# Altium PCB Lantern_REV_B3.PcbDoc (part 1 of 2)
Units mm, origin at the board's own origin, x right, y up, seen from the top; angles counter-clockwise.
Board outline 55 x 135 mm, 4 copper layers (SIG/PWR1, GND1, GND2, SIG/PWR2), stack 1.527 mm thick; 136 components, 65 nets, 452 pads, 147 vias.
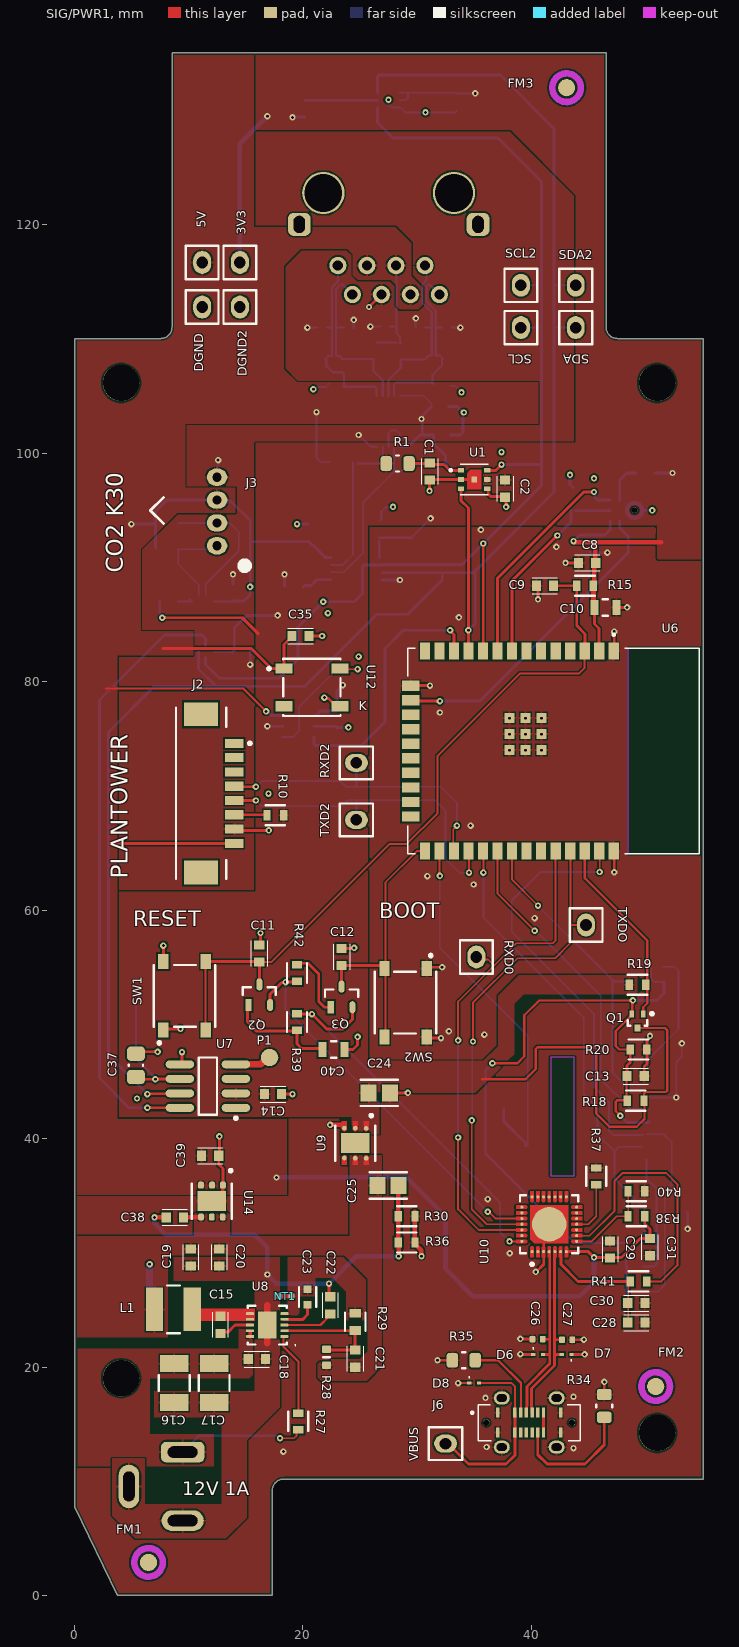
[diagram p0: SIG/PWR1 view]
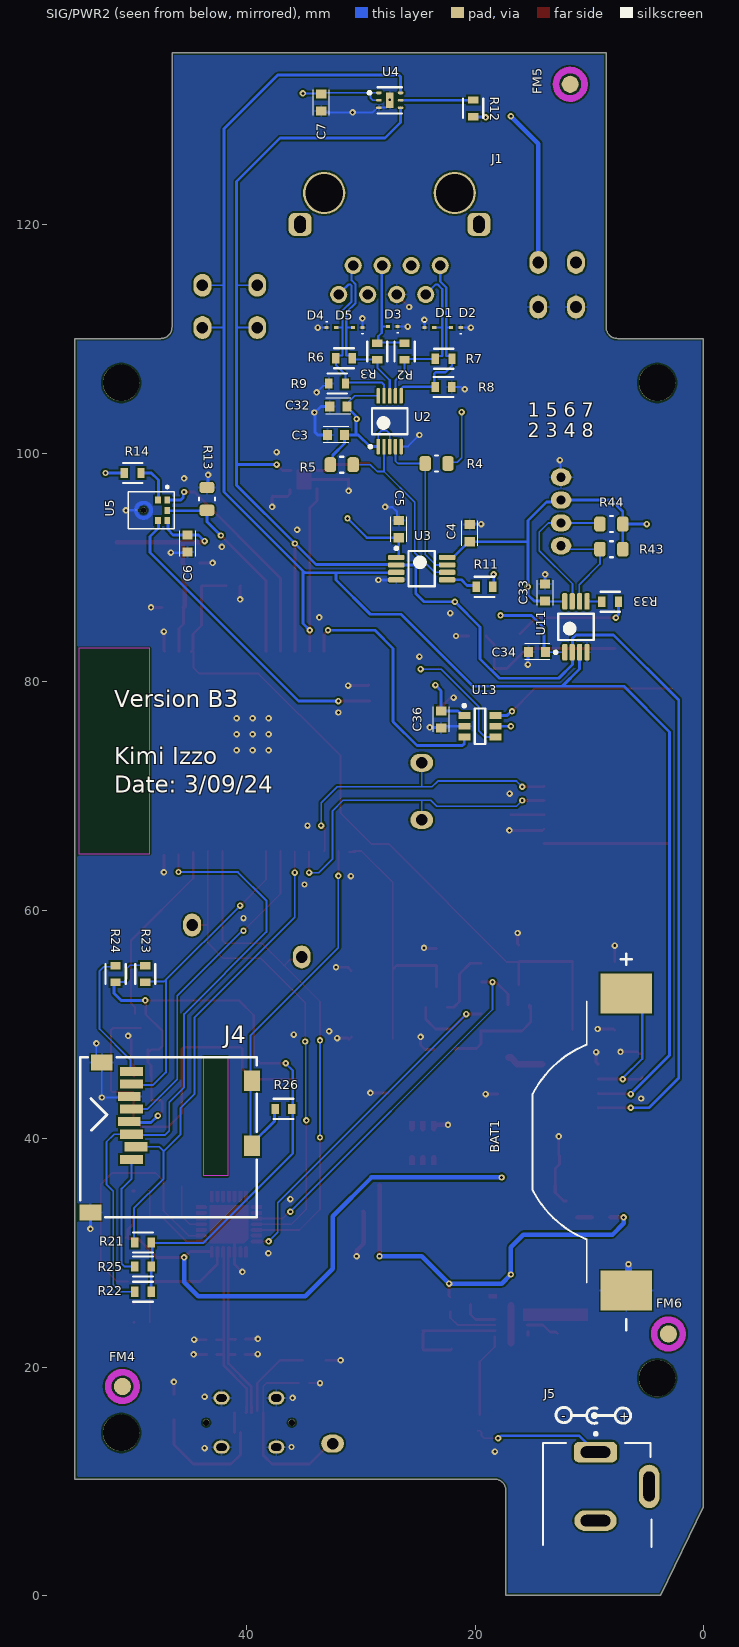
[diagram p1: SIG/PWR2 view, seen from below]
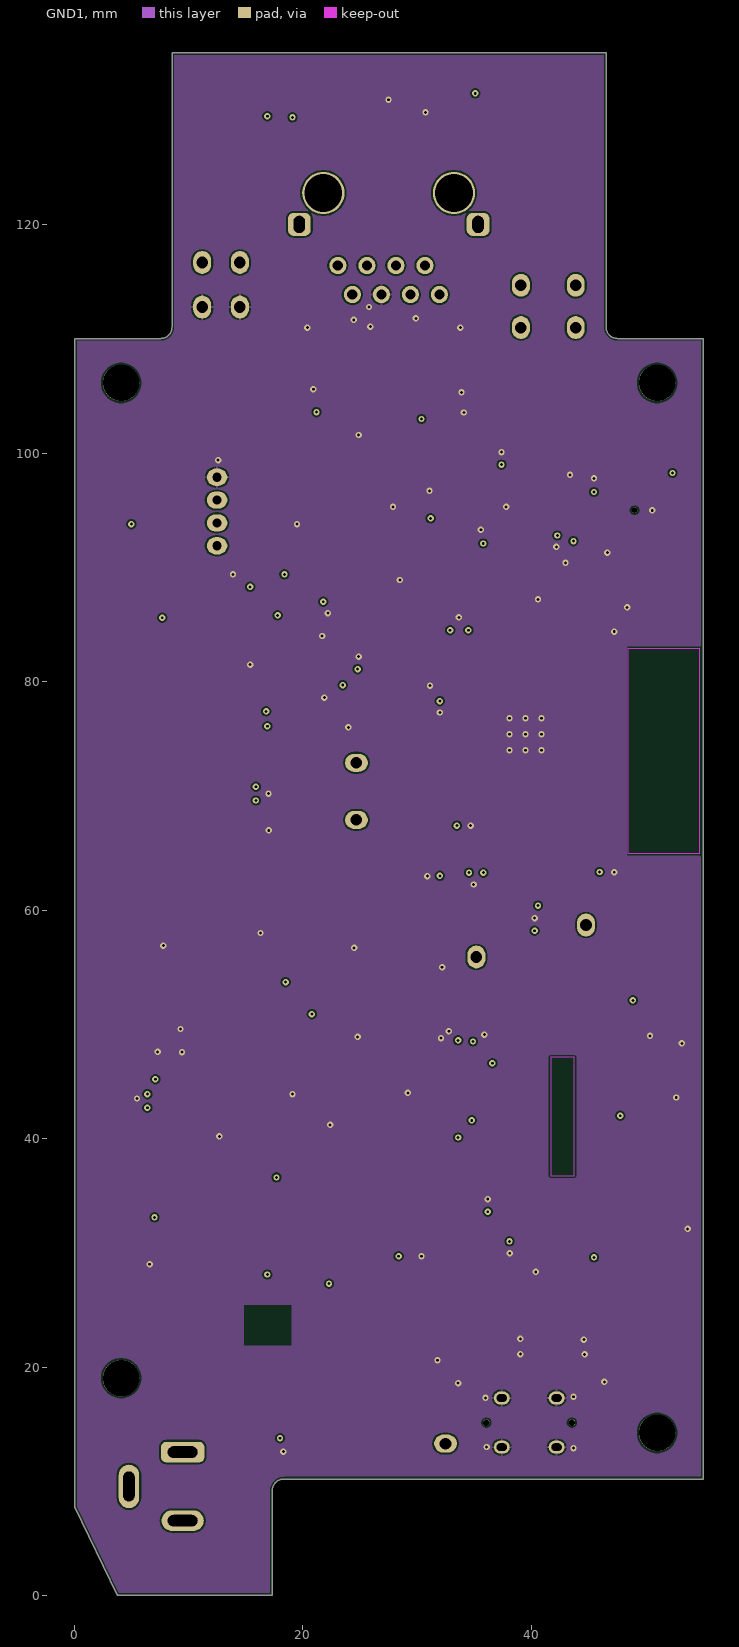
[diagram p2: GND1]
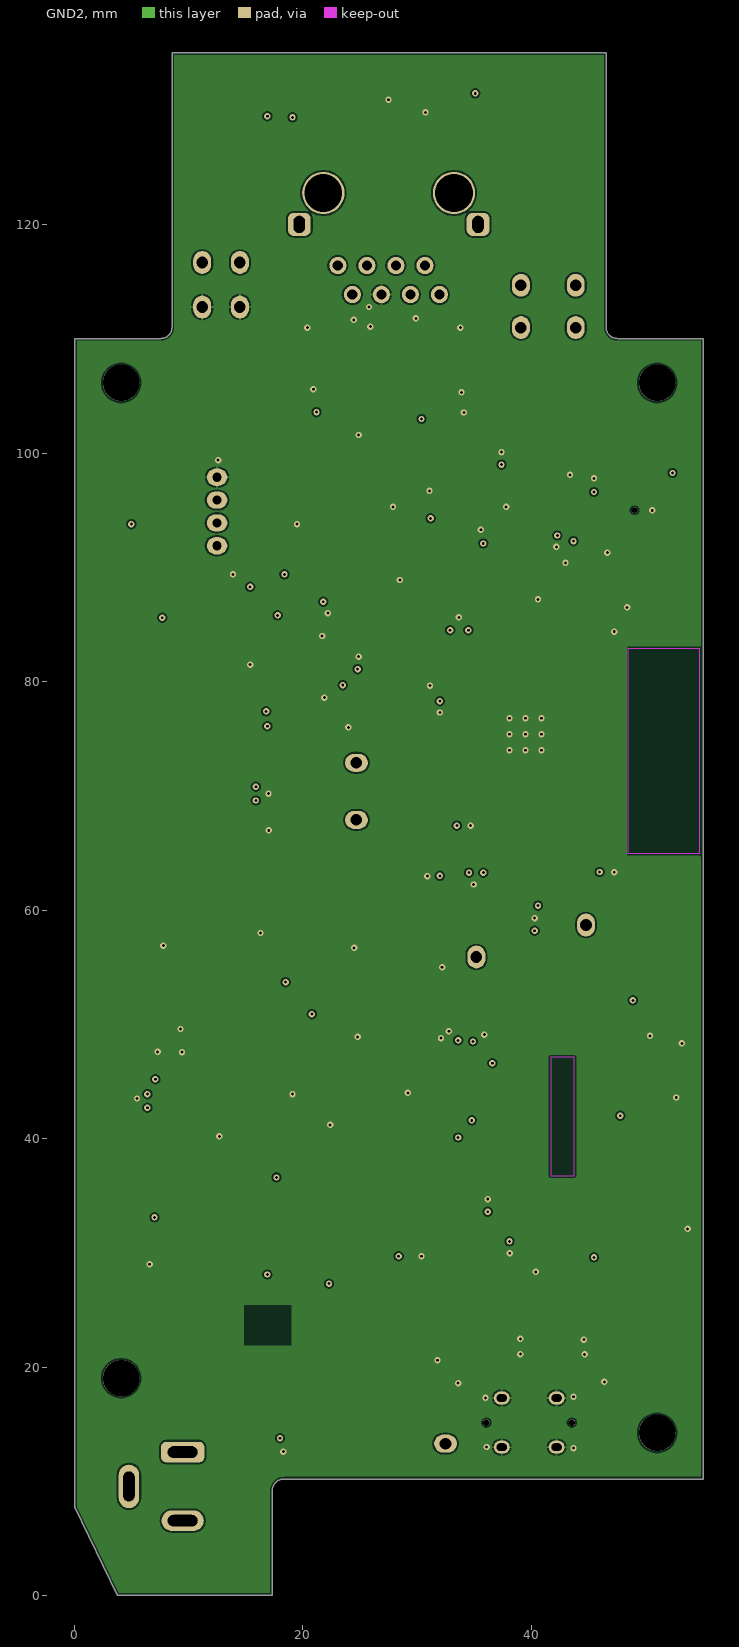
[diagram p3: GND2]
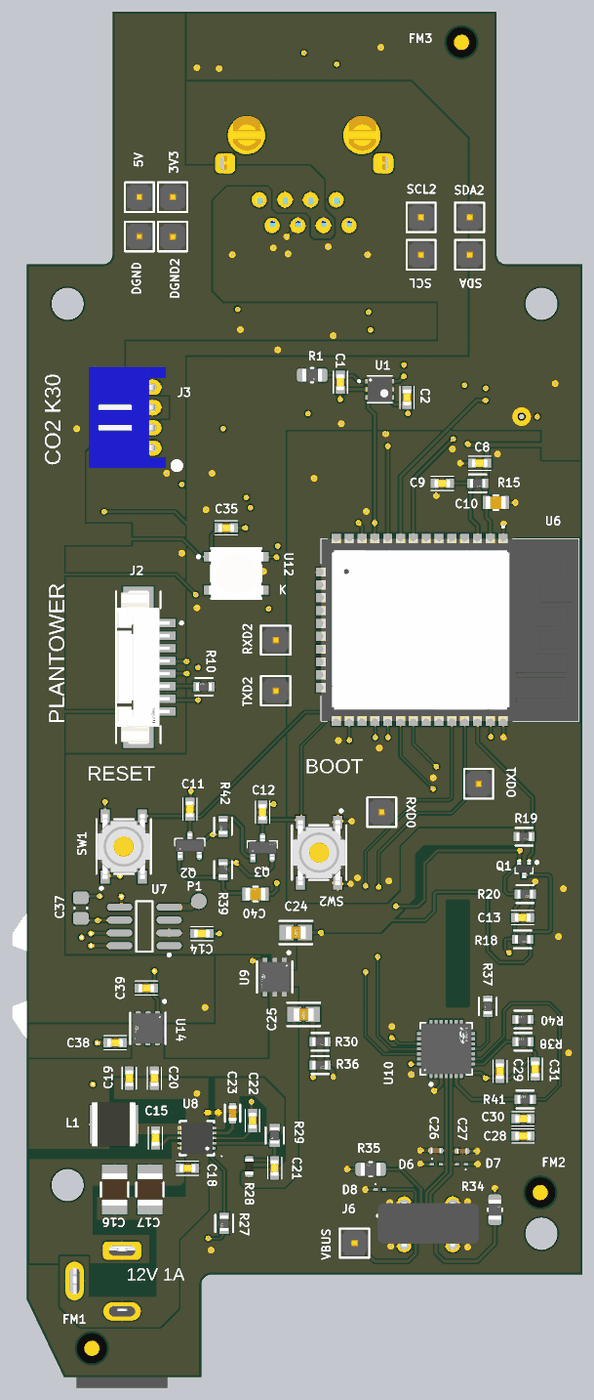
[diagram p5: 3D render of the assembled board from above, using the file's embedded part models]
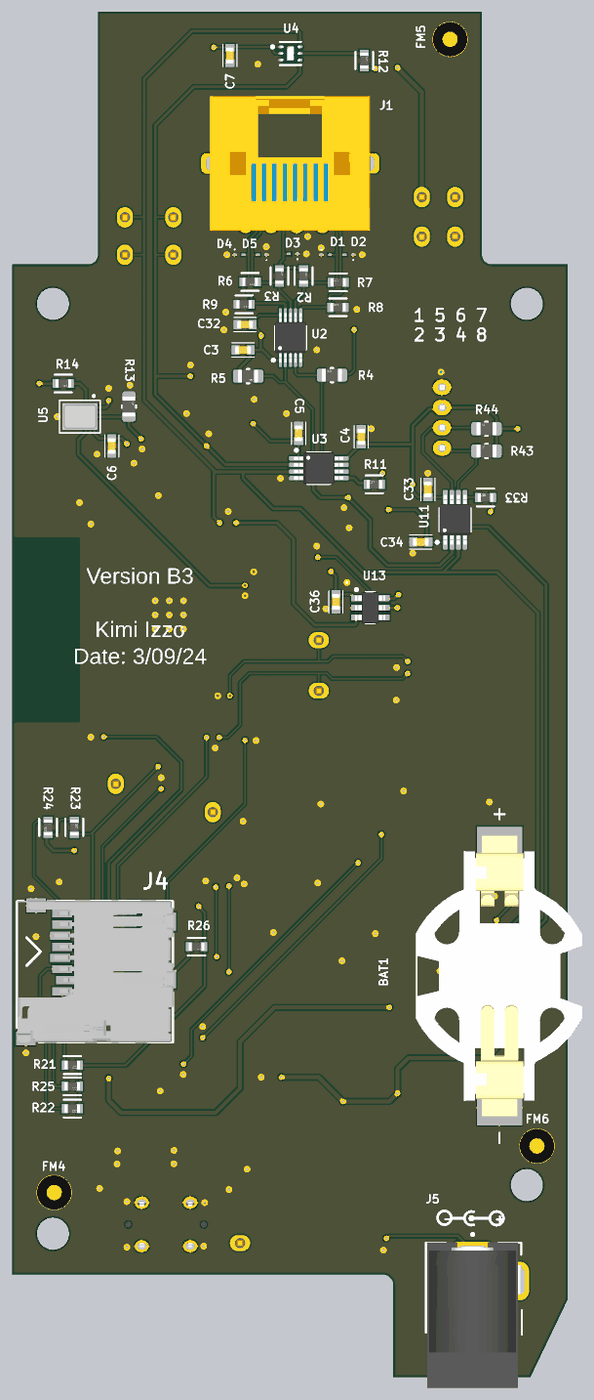
[diagram p6: 3D render of the assembled board from below, using the file's embedded part models]

## Layer stack, top to bottom
Top Solder: solder mask 0.0175, Solder Resist, Dk 3.5
SIG/PWR1: signal copper 0.0175
Dielectric 2: prepreg 0.196, PP-006, Dk 4.56
GND1: signal copper 0.035
Dielectric 1: dielectric 1.03, FR-4, Dk 4.6
GND2: signal copper 0.035
Dielectric 3: prepreg 0.196, PP-006, Dk 4.56
SIG/PWR2: signal copper 0.0175
Bottom Solder: solder mask 0.0175, Solder Resist, Dk 3.5

## Board outline
0.058,7.741 0.058,110.041 7.558,110.041 7.558,110.042 ccw(c7.558,111.042) 8.558,111.042 8.558,135.043 46.558,135.043 46.558,111.042 ccw(c47.558,111.042) 47.558,110.042 47.558,110.041 55.058,110.041 55.058,10.189 18.327,10.189 18.328,10.191 ccw(c18.328,9.191) 17.328,9.191 17.328,0.041 3.758,0.041

## Design rules (kind name [scope] priority, off if disabled: settings)
BoardOutlineClearance [All] p1: gap=0.2 ignorepadtopadclearanceinfootprint=FALSE
Clearance [All] p1: gap=0.154 ignorepadtopadclearanceinfootprint=TRUE
ComponentClearance [All] p1: gap=0.102 collisioncheckmode=3 verticalgap=0.102 showdistances=TRUE
DiffPairsRouting [InDifferentialPair('D')] p1: maxlimit=0.254 minlimit=0.125 mostfreqgap=0.254 toplayer_mingap=0.154 toplayer_maxgap=0.154 toplayer_prefgap=0.154 toplayer_minwidth=0.246 toplayer_maxwidth=0.246 toplayer_prefwidth=0.246 bottomlayer_mingap=0.154 bottomlayer_maxgap=0.154 bottomlayer_prefgap=0.154 bottomlayer_minwidth=0.246 bottomlayer_maxwidth=0.246 bottomlayer_prefwidth=0.246 impedanceprofiledriven=TRUE impedanceprofileid={B0678E9C-AD64-40C4-918B-FBF8B8CF60FA} impedanceprofilevalue=90.000000 maxuncoupledlength=12.7
DiffPairsRouting "di2c scl diff pair" [InDifferentialPair('SCL')] p2: maxlimit=0.154 minlimit=0.127 mostfreqgap=0.154 toplayer_mingap=0.154 toplayer_minwidth=0.188 toplayer_maxwidth=0.188 toplayer_prefwidth=0.188 bottomlayer_mingap=0.154 bottomlayer_minwidth=0.188 bottomlayer_maxwidth=0.188 bottomlayer_prefwidth=0.188 impedanceprofiledriven=TRUE impedanceprofileid={01536B08-8223-496A-8431-0511F6C60731} impedanceprofilevalue=100.000000 maxuncoupledlength=12.7
DiffPairsRouting "di2c sda diff pair" [InDifferentialPair('SDA')] p3: maxlimit=0.154 minlimit=0.127 mostfreqgap=0.154 toplayer_mingap=0.154 toplayer_minwidth=0.188 toplayer_maxwidth=0.188 toplayer_prefwidth=0.188 bottomlayer_mingap=0.154 bottomlayer_minwidth=0.188 bottomlayer_maxwidth=0.188 bottomlayer_prefwidth=0.188 impedanceprofiledriven=TRUE impedanceprofileid={01536B08-8223-496A-8431-0511F6C60731} impedanceprofilevalue=100.000000 maxuncoupledlength=12.7
Height [All] p1: minheight=0 maxheight=1816.048 prefheight=12.7
HoleSize [All] p1: absolutevalues=TRUE maxlimit=6.3 minlimit=0.255 maxpercent=80.000 minpercent=20.000
HoleToHoleClearance [All] p1: gap=0.254 allowstackedmicrovias=FALSE
MinimumAnnularRing [All] p1: minimumring=0.15
MinimumSolderMaskSliver [All] p1: minsoldermaskwidth=0.102
PlaneClearance [All] p1: clearance=0.102
PlaneConnect "Direct connect" [All] p1: pad.planeconnectstyle=Direct pad.reliefexpansion=0.508 pad.reliefentries=4 pad.reliefconductorwidth=0.254 pad.reliefairgap=0.254 via.planeconnectstyle=Relief via.reliefexpansion=0.508 via.reliefentries=4 via.reliefconductorwidth=0.254 via.reliefairgap=0.254
PolygonConnect "DGND CONNECT" [InNet('DGND')] p1: thpad.connectstyle=Relief thpad.reliefconductorwidth=0.2 thpad.reliefentries=4 thpad.polygonreliefangle="90 Angle" thpad.airgapwidth=0.155 smdpad.connectstyle=Relief smdpad.reliefconductorwidth=0.2 smdpad.reliefentries=4 smdpad.polygonreliefangle="90 Angle" smdpad.airgapwidth=0.102 via.connectstyle=Direct via.reliefconductorwidth=0.2 via.reliefentries=4 via.polygonreliefangle="90 Angle" via.airgapwidth=0.155
PolygonConnect "PGND CONNECT" [(InNet('PGND') AND NOT InComponent('U8')) vs InNet('PGND')] p2: thpad.connectstyle=Relief thpad.reliefconductorwidth=0.2 thpad.reliefentries=4 thpad.polygonreliefangle="90 Angle" thpad.airgapwidth=0.155 smdpad.connectstyle=Relief smdpad.reliefconductorwidth=0.2 smdpad.reliefentries=4 smdpad.polygonreliefangle="90 Angle" smdpad.airgapwidth=0.102 via.connectstyle=Direct via.reliefconductorwidth=0.2 via.reliefentries=4 via.polygonreliefangle="90 Angle" via.airgapwidth=0.155
PolygonConnect "5V CONNECT" [InNet('5V')] p3: thpad.connectstyle=Relief thpad.reliefconductorwidth=0.2 thpad.reliefentries=4 thpad.polygonreliefangle="90 Angle" thpad.airgapwidth=0.155 smdpad.connectstyle=Relief smdpad.reliefconductorwidth=0.2 smdpad.reliefentries=4 smdpad.polygonreliefangle="90 Angle" smdpad.airgapwidth=0.102 via.connectstyle=Direct via.reliefconductorwidth=0.2 via.reliefentries=4 via.polygonreliefangle="90 Angle" via.airgapwidth=0.155
PolygonConnect "3V3 SD CONNECT" [InNet('3.3V_SD')] p4: thpad.connectstyle=Relief thpad.reliefconductorwidth=0.2 thpad.reliefentries=4 thpad.polygonreliefangle="90 Angle" thpad.airgapwidth=0.155 smdpad.connectstyle=Relief smdpad.reliefconductorwidth=0.2 smdpad.reliefentries=4 smdpad.polygonreliefangle="90 Angle" smdpad.airgapwidth=0.102 via.connectstyle=Direct via.reliefconductorwidth=0.2 via.reliefentries=4 via.polygonreliefangle="90 Angle" via.airgapwidth=0.155
PolygonConnect "C16 CONNECT" [InNet('NetC16_2')] p5: thpad.connectstyle=Relief thpad.reliefconductorwidth=0.2 thpad.reliefentries=4 thpad.polygonreliefangle="90 Angle" thpad.airgapwidth=0.155 smdpad.connectstyle=Relief smdpad.reliefconductorwidth=0.2 smdpad.reliefentries=4 smdpad.polygonreliefangle="90 Angle" smdpad.airgapwidth=0.102 via.connectstyle=Direct via.reliefconductorwidth=0.2 via.reliefentries=4 via.polygonreliefangle="90 Angle" via.airgapwidth=0.155
PolygonConnect GNDCONNECT_1 [InNet('GND')] p6: thpad.connectstyle=Relief thpad.reliefconductorwidth=0.2 thpad.reliefentries=4 thpad.polygonreliefangle="90 Angle" thpad.airgapwidth=0.155 smdpad.connectstyle=Relief smdpad.reliefconductorwidth=0.2 smdpad.reliefentries=4 smdpad.polygonreliefangle="90 Angle" smdpad.airgapwidth=0.102 via.connectstyle=Direct via.reliefconductorwidth=0.2 via.reliefentries=4 via.polygonreliefangle="90 Angle" via.airgapwidth=0.155
PolygonConnect "3V3 CONNECT" [InNet('3.3V')] p7: thpad.connectstyle=Relief thpad.reliefconductorwidth=0.2 thpad.reliefentries=4 thpad.polygonreliefangle="90 Angle" thpad.airgapwidth=0.155 smdpad.connectstyle=Relief smdpad.reliefconductorwidth=0.2 smdpad.reliefentries=4 smdpad.polygonreliefangle="90 Angle" smdpad.airgapwidth=0.102 via.connectstyle=Direct via.reliefconductorwidth=0.2 via.reliefentries=4 via.polygonreliefangle="90 Angle" via.airgapwidth=0.155
PolygonConnect "5V BARREL" [InNet('5V_BRRL')] p8: thpad.connectstyle=Relief thpad.reliefconductorwidth=0.2 thpad.reliefentries=4 thpad.polygonreliefangle="90 Angle" thpad.airgapwidth=0.155 smdpad.connectstyle=Relief smdpad.reliefconductorwidth=0.2 smdpad.reliefentries=4 smdpad.polygonreliefangle="90 Angle" smdpad.airgapwidth=0.102 via.connectstyle=Direct via.reliefconductorwidth=0.2 via.reliefentries=4 via.polygonreliefangle="90 Angle" via.airgapwidth=0.155
PolygonConnect PolygonConnect_1 [All] p9: connectstyle=Direct reliefconductorwidth=0.254 reliefentries=4 polygonreliefangle="90 Angle" airgapwidth=0.254
RoutingVias [All] p1: holewidth=0.255 width=0.56 viastyle="Through Hole" minholewidth=0.255 minwidth=0.56 maxholewidth=6.3 maxwidth=6.55
SilkToSilkClearance [All] p1: silktosilkclearance=0.127
SilkToSolderMaskClearance [IsPad] p1: minsilkscreentomaskgap=0.127 clearancetoexposedcopper=TRUE
SolderMaskExpansion [All] p1: expansion=0.051 istentingtop=FALSE
UnRoutedNet [All] p1: checkbadconnections=TRUE
Width general [All] p1: maxlimit=0.6 minlimit=0.153 preferedwidth=0.25
Width [All] p2: maxlimit=0.254 minlimit=0.254 preferedwidth=0.254
Width Power_20mil [All] p3: maxlimit=25.4 minlimit=0.508 preferedwidth=0.508 minimp=50.000000 maximp=50.000000 favimp=50.000000
Width Width_10mil [All] p4: maxlimit=25.4 minlimit=0.254 preferedwidth=0.254 minimp=50.000000 maximp=50.000000 favimp=50.000000
Width Width_6mil [All] p5: maxlimit=25.4 minlimit=0.153 preferedwidth=0.2 minimp=50.000000 maximp=50.000000 favimp=50.000000
Width Width_4mil [All] p6: maxlimit=25.4 minlimit=0.102 preferedwidth=0.102 minimp=50.000000 maximp=50.000000 favimp=50.000000
19 further rules are at their usual default settings.

## Classes and differential pairs
component class Sensors_revB3: C1 C2 C3 C4 C5 C6 C7 C32 C33 C34 D1 D2 D3 D4 D5 J1 J2 J3 R1 R2 R3 R4 R5 R6 R7 R8 R9 R10 R11 R12 R13 R14 R33 R43 R44 U1 U2 U3 U4 U5 U11
component class Power_revB3: C15 C16 C17 C18 C19 C20 C21 C22 C23 C24 C25 C26 C27 C28 C29 C30 C31 C38 C39 C40 D6 D7 D8 J5 J6 L1 NT1 Q2 Q3 R27 R28 R29 R30 R34 R35 R36 R37 R38 R39 R40 R41 R42 U8 U9 U10 U14
component class Main_revB3: 3V3 5V *2 *3 *5 *? BAT1 C8 C9 C10 C11 C12 C13 C14 C35 C36 C37 DGND DGND2 FM1 FM2 FM3 FM4 FM5 FM6 J4 P1 Q1 R15 R18 R19 R20 R21 R22 R23 R24 R25 R26 RXD0 RXD2 SCL SCL2 SDA SDA2 SW1 SW2 TXD2 TXDO U6 U7 U12 U13 VBUS
differential pair SDA: +SDA_P -SDA_N
differential pair SCL: +SCL_P -SCL_N
differential pair D: +D_P -D_N

## Components (designator, comment, footprint, x,y, rotation, side; value= is the part's Value field where it differs from the comment)
3V3 "PH1-01-UA" FP-PH1-01-UA-MFG 14.5,116.7 r90 top
5V "PH1-01-UA" FP-PH1-01-UA-MFG 11.2,116.7 r90 top
BAT1 "BU1632SM-JJ-GTR" BU1632SM-JJ-GTR-Footprint-1 6.8,39.7 r270 bottom
C1 "CL10B105KA8NFNC" MANUF_CAP_0603 31.108,98.398 r90 top value=1µF
C2 "CL10B105KA8NFNC" MANUF_CAP_0603 37.708,96.898 r90 top value=1µF
C3 "CC0603KRX7R7BB104" MANUF_CAP_0603 32.2,101.6 r180 bottom value=100nF
C4 "CC0603KRX7R7BB104" MANUF_CAP_0603 20.5,93 r270 bottom value=100nF
C5 "CC0603KRX7R7BB104" MANUF_CAP_0603 26.7,93.35 r270 bottom value=100nF
C6 "CC0603KRX7R7BB104" MANUF_CAP_0603 45.2,92.1 r90 bottom value=100nF
C7 "CC0603KRX7R7BB104" MANUF_CAP_0603 33.5,130.7 r90 bottom value=100nF
C8 "CC0603KRX7R7BB104" MANUF_CAP_0603 44.9,90.4 r0 top value=100nF
C9 "CL10B105KA8NFNC" MANUF_CAP_0603 41.2,88.4 r0 top value=1µF
C10 "GRM21BZ71A226ME15L" FP-GRM21B-0_2-e0_2_0_7-MFG 46.5,86.5 r180 top value=22µF
C11 "CC0603KRX7R7BB104" MANUF_CAP_0603 16.2,56.2 r90 top value=100nF
C12 "CC0603KRX7R7BB104" MANUF_CAP_0603 23.4,55.9 r90 top value=100nF
C13 "CL10B105KA8NFNC" MANUF_CAP_0603 49.15,45.48 r180 top value=1µF
C14 "CL10B105KA8NFNC" MANUF_CAP_0603 17.4,43.9 r180 top value=1µF
C15 "CC0603KRX7R7BB104" MANUF_CAP_0603 12.8,23.7 r270 top value=100nF
C16 "C1210C106M3RACTU" FP-1210-L_3_2_0_3-W_2_5_0-MFG 8.748,18.6 r90 top value=10µF
C17 "C1210C106M3RACTU" FP-1210-L_3_2_0_3-W_2_5_0-MFG 12.248,18.6 r90 top value=10µF
C18 "CC0603KRX7R7BB104" MANUF_CAP_0603 15.975,20.7 r180 top value=100nF
C19 "C0603C220J5GACTU" MANUF_CAP_0603 10.2,29.6 r270 top value=22pF
C20 "C0603C220J5GACTU" MANUF_CAP_0603 12.7,29.6 r270 top value=22pF
C21 "C0603C220J5GACTU" MANUF_CAP_0603 24.592,20.734 r90 top value=22pF
C22 "CL10B105KA8NFNC" MANUF_CAP_0603 22.413,25.41 r270 top value=1µF
C23 "GRM1885C1H822JA01D" FP-GRM188-0_1-e0_2_0_5-MFG 20.432,26.139 r270 top value=8.2nF
C24 "CL21B106KOQNNNE" FP-CL21B106KOQNNNE-IPC_A 26.7,44 r180 top value=10µF
C25 "CL21B106KOQNNNE" FP-CL21B106KOQNNNE-IPC_A 27.474,35.9 r180 top value=10µF
C26 "Capacitor 22pF +/-10% 50V 0402" CAPC0402(1005)60_L 40.564,22.442 r0 top value=22pF
C27 "Capacitor 22pF +/-10% 50V 0402" CAPC0402(1005)60_L 43.145,22.388 r180 top value=22pF
C28 "Capacitor 4.7µF +/-20% 10V 0603" MANUF_CAP_0603 49.2,23.9 r180 top value=4.7µF
C29 "Capacitor 4.7µF +/-20% 10V 0603" MANUF_CAP_0603 46.9,30.3 r270 top value=4.7µF
C30 "CC0603KRX7R7BB104" MANUF_CAP_0603 49.2,25.6 r180 top value=100nF
C31 "CC0603KRX7R7BB104" MANUF_CAP_0603 50.4,30.5 r90 top value=100nF
C32 "CC0603KRX7R7BB104" MANUF_CAP_0603 32,104.1 r180 bottom value=100nF
C33 "CC0603KRX7R7BB104" MANUF_CAP_0603 13.9,87.8 r270 bottom value=100nF
C34 "CC0603KRX7R7BB104" MANUF_CAP_0603 14.6,82.6 r180 bottom value=100nF
C35 "CC0603KRX7R7BB104" MANUF_CAP_0603 19.8,84 r0 top value=100nF
C36 "CC0603KRX7R7BB104" MANUF_CAP_0603 23,76.7 r270 bottom value=100nF
C37 "C0805C102K2GEC7800" 0805#1 5.4,46.416 r270 top value=1nF
C38 "CL10B105KA8NFNC" MANUF_CAP_0603 8.8,33.1 r0 top value=1µF
C39 "Capacitor 4.7µF +/-20% 10V 0603" MANUF_CAP_0603 11.9,38.5 r180 top value=4.7µF
C40 "GRM21BZ71A226ME15L" FP-GRM21B-0_2-e0_2_0_7-MFG 22.7,47.8 r180 top value=22µF
D1 "ESD9B5.0ST5G" ONSC-SOD-923-2-514AB-01_V 24.02,111 r180 bottom
D2 "ESD9B5.0ST5G" ONSC-SOD-923-2-514AB-01_V 21.7,111 r0 bottom
D3 "ESD9B5.0ST5G" ONSC-SOD-923-2-514AB-01_V 27.226,111.084 r0 bottom
D4 "ESD9B5.0ST5G" ONSC-SOD-923-2-514AB-01_V 32.6,111 r180 bottom
D5 "ESD9B5.0ST5G" ONSC-SOD-923-2-514AB-01_V 30.3,111 r0 bottom
D6 "ESD9B5.0ST5G" ONSC-SOD-923-2-514AB-01_V 40.601,21.104 r0 top
D7 "ESD9B5.0ST5G" ONSC-SOD-923-2-514AB-01_V 43.094,21.104 r180 top
D8 "ESD9B5.0ST5G" ONSC-SOD-923-2-514AB-01_V 35,18.6 r0 top
DGND "PH1-01-UA" FP-PH1-01-UA-MFG 11.2,112.8 r270 top
DGND2 "PH1-01-UA" FP-PH1-01-UA-MFG 14.5,112.8 r90 top
FM1 "fiducial 1mm" "fiducial 1mm-Footprint-1"#1 6.5,2.9 r0 top
FM2 "fiducial 1mm" "fiducial 1mm-Footprint-1"#1 50.9,18.3 r0 top
FM3 "fiducial 1mm" "fiducial 1mm-Footprint-1"#1 43.1,132 r0 top
FM4 "fiducial 1mm" "fiducial 1mm-Footprint-1"#2 50.9,18.3 r180 bottom
FM5 "fiducial 1mm" "fiducial 1mm-Footprint-1"#2 11.7,132.3 r180 bottom
FM6 "fiducial 1mm" "fiducial 1mm-Footprint-1"#2 3.1,22.9 r180 bottom
J1 "09455511103" 09455511103-Footprint-1 24.347,113.892 r0 bottom locked
J2 "53261-0871" FP-532610871-MFG 11.1,70.225 r90 top
J3 "S4B-PH-K-S" S4B-PH-K-S-Footprint-1 12.5,97.9 r270 top locked
J4 "MEM2061-01-188-00-A" MEM2061-01-188-00-A-Footprint-1 46.623,40.1 r270 bottom locked
J5 "PJ-102A" FP-PJ-102A-MFG 9.488,6.053 r0 bottom
J6 "GSB1CA11101DSHR" GSB1CA11101DSHR-Footprint-1 39.822,15.14 r0 top locked
L1 "PA5430.332NLT" INDC4141X31N 8.675,25.05 r180 top value=3.3µH
NT1 "Net tie solid pad" "Net tie solid pad-Footprint-1" 18.5,26.2 r0 top net-tie
P1 "PAD" PAD-Footprint-1 17.1,47.1 r0 top
Q1 "SI3139KEA-TP" SOT50P160X80-3N 49.3,50.3 r270 top
Q2 "SS8050-G" FP-SS8050-G-IPC_C 16.2,52.6 r90 top
Q3 "SS8050-G" FP-SS8050-G-IPC_C 23.4,52.4 r90 top
R1 "SR0805FR-7W4R7L" 0805#2 28.308,99.098 r180 top value=4.7R
R2 "ERJ-3EKF5900V" MANUF_RES_0603 26.2,108.9 r90 bottom value=590
R3 "ERJ-3EKF5900V" MANUF_RES_0603 28.6,108.9 r90 bottom value=590
R4 "RC0805JR-075K1L" 0805#2 23.4,99.1 r180 bottom value=5.1k
R5 "RC0805JR-075K1L" 0805#2 31.7,99 r0 bottom value=5.1k
R6 "RMCF0603FT110R" MANUF_RES_0603 31.503,108.315 r180 bottom value=110
R7 "RMCF0603FT110R" MANUF_RES_0603 22.775,108.27 r0 bottom value=110
R8 "ERJ-3EKF5900V" MANUF_RES_0603 22.8,105.8 r0 bottom value=590
R9 "ERJ-3EKF5900V" MANUF_RES_0603 32.1,106.1 r180 bottom value=590
R10 "RC0603FR-0710KL" MANUF_RES_0603 17.6,68.3 r180 top value=10k
R11 "RC0603FR-0710KL" MANUF_RES_0603 19.2,88.3 r0 bottom value=10k
R12 "RC0603FR-0710KL" MANUF_RES_0603 20.2,130.2 r90 bottom value=10k
R13 "RCC0805100KFKEA" FP-RNCP0805-MFG 43.5,96 r270 bottom value=100k
R14 "RC0603FR-0710KL" MANUF_RES_0603 50.001,98.271 r180 bottom value=10k
R15 "RC0603FR-0710KL" MANUF_RES_0603 44.7,88.4 r0 top value=10k
R18 "Resistor 0R +/- 5% 0603 100 mW" MANUF_RES_0603 49.15,43.323 r0 top value=0
R19 "RC0603FR-0710KL" MANUF_RES_0603 49.3,53.475 r0 top value=10k
R20 "ERJ-3EKF2001V" MANUF_RES_0603 49.4,47.8 r0 top value=2k
R21 "CRCW060347K5FKEAHP" MANUF_RES_0603 49.1,30.9 r180 bottom value=47.5k
R22 "CRCW060347K5FKEAHP" MANUF_RES_0603 49.1,26.6 r180 bottom value=47.5k
R23 "CRCW060347K5FKEAHP" MANUF_RES_0603 48.9,54.4 r90 bottom value=47.5k
R24 "CRCW060347K5FKEAHP" MANUF_RES_0603 51.5,54.4 r270 bottom value=47.5k
R25 "CRCW060347K5FKEAHP" MANUF_RES_0603 49.1,28.8 r180 bottom value=47.5k
R26 "CRCW060347K5FKEAHP" MANUF_RES_0603 36.8,42.6 r180 bottom value=47.5k
R27 "RC0603FR-0710KL" MANUF_RES_0603 19.6,15.25 r270 top value=10k
R28 "RCS0603124KFKEA" RESC0603(1608)_L 22.083,20.867 r90 top value=124k
R29 "CRCW060322K1FKEAHP" FP-CRCW0603-HPe3-MFG 24.6,23.95 r270 top value=22.1k
R30 "Resistor 0R +/- 5% 0603 100 mW" MANUF_RES_0603 29.1,33.2 r0 top value=0
R33 "RC0603FR-0710KL" MANUF_RES_0603 8.2,87 r0 bottom value=10k
R34 "RC0805JR-075K1L" 0805#2 46.4,16.6 r270 top value=5.1k
R35 "RC0805JR-075K1L" 0805#2 34.1,20.6 r0 top value=5.1k
R36 "Resistor 0R +/- 5% 0603 100 mW" MANUF_RES_0603 29.1,30.9 r0 top value=0
R37 "RC0603FR-0710KL" MANUF_RES_0603 45.7,36.7 r270 top value=10k
R38 "RMCF0603FT22K1" MANUF_RES_0603 49.2,33.2 r180 top value=22.1k
R39 "RC0603FR-0710KL" MANUF_RES_0603 19.5,50.2 r90 top value=10k
R40 "CRCW060347K5FKEAHP" MANUF_RES_0603 49.2,35.4 r180 top value=47.5k
R41 "ERJ-3EKF2001V" MANUF_RES_0603 49.4,27.5 r180 top value=2k
R42 "RC0603FR-0710KL" MANUF_RES_0603 19.5,54.5 r270 top value=10k
R43 "RC0805JR-075K1L" 0805#2 8.1,91.6 r180 bottom value=5.1k
R44 "RC0805JR-075K1L" 0805#2 8.1,93.8 r180 bottom value=5.1k
RXD0 "PH1-01-UA" FP-PH1-01-UA-MFG 35.2,55.9 r90 top
RXD2 "PH1-01-UA" FP-PH1-01-UA-MFG 24.7,72.9 r180 top
SCL "PH1-01-UA" FP-PH1-01-UA-MFG 39.1,111 r90 top
SCL2 "PH1-01-UA" FP-PH1-01-UA-MFG 39.1,114.7 r90 top
SDA "PH1-01-UA" FP-PH1-01-UA-MFG 43.9,111 r270 top
SDA2 "PH1-01-UA" FP-PH1-01-UA-MFG 43.9,114.7 r90 top
SW1 "PTS526SK15SMTR2LFS" FP-PTS526SK15SMTR2LFS-MFG 9.65,52.5 r90 top
SW2 "PTS526SK15SMTR2LFS" FP-PTS526SK15SMTR2LFS-MFG 29,51.9 r270 top
TXD2 "PH1-01-UA" FP-PH1-01-UA-MFG 24.7,67.9 r0 top
TXDO "PH1-01-UA" FP-PH1-01-UA-MFG 44.8,58.7 r90 top
U1 "SGP41-D-R4" SGP41-D-R4-Footprint-1 35.008,97.698 r0 top
U2 "PCA9615DPZ" TSSOP50P490X110-10N 27.5,102.8 r90 bottom
U3 "TCA9509DGKR" TSOP65P490X110-8N 24.7,89.9 r180 bottom
U4 "OPT3001DNPR" FP-DNP0006A-MFG 27.5,130.9 r180 bottom
U5 "ICS-43434" FP-ICS-43434-MFG 46.978,95.9 r270 bottom
U6 "ESP32-WROOM-32E-N16" ESP32-WROOM-32E-N16-Footprint-1 38.338,73.921 r270 top locked
U7 "DS3231MZ+TRL" S8MK+1_M 11.7,44.6 r180 top
U8 "TPS54427DRCR" SON50P300X100_HS-11N 16.894,23.679 r180 top
U9 "LD39200PU33R" FP-DFN6-7946637-MFG#1 24.6,39.6 r270 top
U10 "CP2102N-A02-GQFN28" FP-CP2102N-A02-GQFN28-MFG 41.579,32.502 r90 top
U11 "TCA9509DGKR" TSOP65P490X110-8N 11.2,84.8 r90 bottom
U12 "1655" ADA-RGB-1655_V 20.8,79.5 r0 top
U13 "74LVC1T45W6-7" SOT95P285X130-6N 19.6,76.1 r180 bottom
U14 "LDL212PU50R" FP-DFN6-7946637-MFG#2 12.041,34.528 r270 top
VBUS "PH1-01-UA" FP-PH1-01-UA-MFG 32.5,13.3 r180 top

## Footprints (in the part's own frame and the unit in brackets; to place one, negate y for a bottom-side part, rotate by r counter-clockwise, add the part's x,y. Pads: shape width x height; smd on the part's side, far side on the other; paste and mask are expansions set on the pad)
0805#1 [mm]
  rrect50% 1.25x1.55 smd: 1(-1.016,0) 2(1.016,0)
  silkscreen extent -0.05,-0.62 0.05,0.63, body extent -1.1,-0.72 1.1,0.73, height 1.45
0805#2 [mm]
  rrect50% 1x1.3 smd paste+0 mask+0: 1(-1,0) 2(1,0)
  silkscreen extent -0.12,-0.7 0.13,0.7, body extent -1,-0.63 1,0.63, height 0.65
09455511103-Footprint-1 [mm]
  rrect50% 2x2 hole 1 slot 1.5 at 90 deg: 0(-4.65,-6.14) 0(11,-6.14)
  round 3.7 hole 3.3: 0(-2.54,-8.89) 0(8.89,-8.89)
  oval 1.5x1.524 hole 0.9: 1(0,0) 2(-1.27,-2.54) 3(1.27,-2.54) 4(3.81,-2.54) 5(2.54,0) 6(5.08,0) 7(7.62,0) 8(6.35,-2.54)
  body extent -4.73,-12.78 11.17,0.52, height 16.35
ADA-RGB-1655_V [mm] "SMD, 4-Leads, Body 5x5mm"
  rect 1.5x0.9 smd: 1(-2.45,1.65) 2(-2.45,-1.65) 3(2.45,-1.65) 4(2.45,1.65)
  silkscreen extent -3.87,-2.5 2.5,2.5, body extent -2.7,-2.5 2.7,2.5, height 1.68
BU1632SM-JJ-GTR-Footprint-1 [mm]
  rect 3.5x4.5 smd: 1(-13,0) 2(13,0)
  silkscreen extent -16.5,-8.21 16.5,0.5, body extent -13.85,-8.2 13.85,8.2, height 5.3
CAPC0402(1005)60_L [mm] "Chip Capacitor, Body 1.0x0.5mm, Height 0.6mm, IPC High Density"
  rrect25% 0.5x0.55 smd: 1(-0.45,0) 2(0.45,0)
  body extent -0.5,-0.25 0.5,0.25, height 0.6
ESP32-WROOM-32E-N16-Footprint-1 [mm]
  rect 1.5x0.9 smd: 1(-8.75,8.88) 2(-8.75,7.61) 3(-8.75,6.34) 4(-8.75,5.07) 5(-8.75,3.8) 6(-8.75,2.53) 7(-8.75,1.26) 8(-8.75,-0.01) 9(-8.75,-1.28) 10(-8.75,-2.55) 11(-8.75,-3.82) 12(-8.75,-5.09) 13(-8.75,-6.36) 14(-8.75,-7.63) 25(8.75,-7.63) 26(8.75,-6.36) 27(8.75,-5.09) 28(8.75,-3.82) 29(8.75,-2.55) 30(8.75,-1.28) 31(8.75,-0.01) 32(8.75,1.26) 33(8.75,2.53) 34(8.75,3.8) 35(8.75,5.07) 36(8.75,6.34) 37(8.75,7.61) 38(8.75,8.88)
  rect 0.9x1.5 smd: 15(-5.715,-8.88) 16(-4.445,-8.88) 17(-3.175,-8.88) 18(-1.905,-8.88) 19(-0.635,-8.88) 20(0.635,-8.88) 21(1.905,-8.88) 22(3.175,-8.88) 23(4.445,-8.88) 24(5.715,-8.88)
  rect 0.9x0.9 smd: 39_1(-2.9,2.56) 39_2(-1.5,2.56) 39_3(-0.1,2.56) 39_4(-2.9,1.16) 39_5(-1.5,1.16) 39_6(-0.1,1.16) 39_7(-2.9,-0.24) 39_8(-1.5,-0.24) 39_9(-0.1,-0.24)
  Keep-Out Layer region: 9,10.18 -9,10.18 -9,16.37 9,16.37
  silkscreen extent -10.3,-9.13 9,16.37, body extent -9,-9.13 9,16.37, height 3.25
"fiducial 1mm-Footprint-1"#1 [mm]
  round 1.5 smd paste-1 mask+0.75: 0(0,0)
  SIG/PWR1 keep-out circle w0.58: c0,0 r1.25
"fiducial 1mm-Footprint-1"#2 [mm]
  round 1.5 smd paste-1 mask+1: 0(0,0)
  SIG/PWR1 keep-out circle w0.58: c0,0 r1.25
FP-1210-L_3_2_0_3-W_2_5_0-MFG [mm]
  rect 1.5x2.5 smd paste+0 mask+0: 1(-1.7,0) 2(1.7,0)
  silkscreen extent -0.7,-1.35 0.7,1.35, body extent -2.42,-1.45 2.42,1.45, height 0.25
FP-532610871-MFG [mm]
  rect 2.1x3 smd paste+0 mask+0: 0(-6.925,0) 0(6.925,0)
  rect 0.8x1.6 smd paste+0 mask+0: 1(4.375,-2.9) 2(3.125,-2.9) 3(1.875,-2.9) 4(0.625,-2.9) 5(-0.625,-2.9) 6(-1.875,-2.9) 7(-3.125,-2.9) 8(-4.375,-2.9)
  silkscreen extent -7.49,-4.4 7.49,2.2, body extent -8.08,-3.8 8.08,2.3, height 0.25
FP-CL21B106KOQNNNE-IPC_A [mm]
  rect 1.406x1.508 smd paste+0 mask+0: 1(-0.926,0) 2(0.926,0)
  silkscreen extent -1.63,-1.15 1.63,1.15, body extent -2.13,-1.25 2.13,1.25, height 0.25
FP-CP2102N-A02-GQFN28-MFG [mm]
  round 0.27 smd paste+0 mask+0: 1(-2.4,1.5) 2(-2.4,1) 3(-2.4,0.5) 4(-2.405,0.002) 5(-2.4,-0.5) 6(-2.4,-1) 7(-2.4,-1.5) 8(-1.5,-2.4) 9(-1,-2.4) 10(-0.5,-2.4) 11(0.004,-2.407) 12(0.5,-2.4) 13(1,-2.4) 14(1.5,-2.4) 15(2.4,-1.5) 16(2.4,-1) 17(2.4,-0.5) 18(2.392,0.011) 19(2.4,0.5) 20(2.4,1) 21(2.4,1.5) 22(1.5,2.4) 23(1,2.4) 24(0.5,2.4) 25(-0.001,2.398) 26(-0.5,2.4) 27(-1,2.4) 28(-1.5,2.4)
  round 3.015 smd paste-1000 mask+0: 29(0,0)
  SIG/PWR1 region: -1.35,2.875 -1.35,2.075 -1.361,2.018 -1.394,1.969 -1.443,1.936 -1.5,1.925 -1.5,1.925 -1.557,1.936 -1.606,1.969 -1.639,2.018 -1.65,2.075 -1.65,2.075 -1.65,2.875
  SIG/PWR1 region: -0.85,2.875 -0.85,2.075 -0.861,2.018 -0.894,1.969 -0.943,1.936 -1,1.925 -1,1.925 -1.057,1.936 -1.106,1.969 -1.139,2.018 -1.15,2.075 -1.15,2.075 -1.15,2.875
  SIG/PWR1 region: -0.35,2.875 -0.35,2.075 -0.361,2.018 -0.394,1.969 -0.443,1.936 -0.5,1.925 -0.5,1.925 -0.557,1.936 -0.606,1.969 -0.639,2.018 -0.65,2.075 -0.65,2.075 -0.65,2.875
  SIG/PWR1 region: 0.15,2.875 0.15,2.075 0.139,2.018 0.106,1.969 0.057,1.936 0,1.925 0,1.925 -0.057,1.936 -0.106,1.969 -0.139,2.018 -0.15,2.075 -0.15,2.075 -0.15,2.875
  SIG/PWR1 region: 0.65,2.875 0.65,2.075 0.639,2.018 0.606,1.969 0.557,1.936 0.5,1.925 0.5,1.925 0.443,1.936 0.394,1.969 0.361,2.018 0.35,2.075 0.35,2.075 0.35,2.875
  SIG/PWR1 region: 1.15,2.875 1.15,2.075 1.139,2.018 1.106,1.969 1.057,1.936 1,1.925 1,1.925 0.943,1.936 0.894,1.969 0.861,2.018 0.85,2.075 0.85,2.075 0.85,2.875
  SIG/PWR1 region: 1.65,2.875 1.65,2.075 1.639,2.018 1.606,1.969 1.557,1.936 1.5,1.925 1.5,1.925 1.443,1.936 1.394,1.969 1.361,2.018 1.35,2.075 1.35,2.075 1.35,2.875
  SIG/PWR1 region: 1.35,-2.875 1.35,-2.075 1.361,-2.018 1.394,-1.969 1.443,-1.936 1.5,-1.925 1.5,-1.925 1.557,-1.936 1.606,-1.969 1.639,-2.018 1.65,-2.075 1.65,-2.075 1.65,-2.875
  SIG/PWR1 region: 0.85,-2.875 0.85,-2.075 0.861,-2.018 0.894,-1.969 0.943,-1.936 1,-1.925 1,-1.925 1.057,-1.936 1.106,-1.969 1.139,-2.018 1.15,-2.075 1.15,-2.075 1.15,-2.875
  SIG/PWR1 region: 0.35,-2.875 0.35,-2.075 0.361,-2.018 0.394,-1.969 0.443,-1.936 0.5,-1.925 0.5,-1.925 0.557,-1.936 0.606,-1.969 0.639,-2.018 0.65,-2.075 0.65,-2.075 0.65,-2.875
  SIG/PWR1 region: -0.15,-2.875 -0.15,-2.075 -0.139,-2.018 -0.106,-1.969 -0.057,-1.936 0,-1.925 0,-1.925 0.057,-1.936 0.106,-1.969 0.139,-2.018 0.15,-2.075 0.15,-2.075 0.15,-2.875
  SIG/PWR1 region: -0.65,-2.875 -0.65,-2.075 -0.639,-2.018 -0.606,-1.969 -0.557,-1.936 -0.5,-1.925 -0.5,-1.925 -0.443,-1.936 -0.394,-1.969 -0.361,-2.018 -0.35,-2.075 -0.35,-2.075 -0.35,-2.875
  SIG/PWR1 region: -1.15,-2.875 -1.15,-2.075 -1.139,-2.018 -1.106,-1.969 -1.057,-1.936 -1,-1.925 -1,-1.925 -0.943,-1.936 -0.894,-1.969 -0.861,-2.018 -0.85,-2.075 -0.85,-2.075 -0.85,-2.875
  SIG/PWR1 region: -1.65,-2.875 -1.65,-2.075 -1.639,-2.018 -1.606,-1.969 -1.557,-1.936 -1.5,-1.925 -1.5,-1.925 -1.443,-1.936 -1.394,-1.969 -1.361,-2.018 -1.35,-2.075 -1.35,-2.075 -1.35,-2.875
  SIG/PWR1 region: 2.875,1.35 2.075,1.35 2.018,1.361 1.969,1.394 1.936,1.443 1.925,1.5 1.925,1.5 1.936,1.557 1.969,1.606 2.018,1.639 2.075,1.65 2.075,1.65 2.875,1.65
  SIG/PWR1 region: 2.875,0.85 2.075,0.85 2.018,0.861 1.969,0.894 1.936,0.943 1.925,1 1.925,1 1.936,1.057 1.969,1.106 2.018,1.139 2.075,1.15 2.075,1.15 2.875,1.15
  SIG/PWR1 region: 2.875,0.35 2.075,0.35 2.018,0.361 1.969,0.394 1.936,0.443 1.925,0.5 1.925,0.5 1.936,0.557 1.969,0.606 2.018,0.639 2.075,0.65 2.075,0.65 2.875,0.65
  SIG/PWR1 region: 2.875,-0.15 2.075,-0.15 2.018,-0.139 1.969,-0.106 1.936,-0.057 1.925,0 1.925,0 1.936,0.057 1.969,0.106 2.018,0.139 2.075,0.15 2.075,0.15 2.875,0.15
  SIG/PWR1 region: 2.875,-0.65 2.075,-0.65 2.018,-0.639 1.969,-0.606 1.936,-0.557 1.925,-0.5 1.925,-0.5 1.936,-0.443 1.969,-0.394 2.018,-0.361 2.075,-0.35 2.075,-0.35 2.875,-0.35
  SIG/PWR1 region: 2.875,-1.15 2.075,-1.15 2.018,-1.139 1.969,-1.106 1.936,-1.057 1.925,-1 1.925,-1 1.936,-0.943 1.969,-0.894 2.018,-0.861 2.075,-0.85 2.075,-0.85 2.875,-0.85
  SIG/PWR1 region: 2.875,-1.65 2.075,-1.65 2.018,-1.639 1.969,-1.606 1.936,-1.557 1.925,-1.5 1.925,-1.5 1.936,-1.443 1.969,-1.394 2.018,-1.361 2.075,-1.35 2.075,-1.35 2.875,-1.35
  SIG/PWR1 region: -2.875,-1.35 -2.075,-1.35 -2.018,-1.361 -1.969,-1.394 -1.936,-1.443 -1.925,-1.5 -1.925,-1.5 -1.936,-1.557 -1.969,-1.606 -2.018,-1.639 -2.075,-1.65 -2.075,-1.65 -2.875,-1.65
  SIG/PWR1 region: -2.875,-0.85 -2.075,-0.85 -2.018,-0.861 -1.969,-0.894 -1.936,-0.943 -1.925,-1 -1.925,-1 -1.936,-1.057 -1.969,-1.106 -2.018,-1.139 -2.075,-1.15 -2.075,-1.15 -2.875,-1.15
  SIG/PWR1 region: -2.875,-0.35 -2.075,-0.35 -2.018,-0.361 -1.969,-0.394 -1.936,-0.443 -1.925,-0.5 -1.925,-0.5 -1.936,-0.557 -1.969,-0.606 -2.018,-0.639 -2.075,-0.65 -2.075,-0.65 -2.875,-0.65
  SIG/PWR1 region: -2.875,0.15 -2.075,0.15 -2.018,0.139 -1.969,0.106 -1.936,0.057 -1.925,0 -1.925,0 -1.936,-0.057 -1.969,-0.106 -2.018,-0.139 -2.075,-0.15 -2.075,-0.15 -2.875,-0.15
  SIG/PWR1 region: -2.875,0.65 -2.075,0.65 -2.018,0.639 -1.969,0.606 -1.936,0.557 -1.925,0.5 -1.925,0.5 -1.936,0.443 -1.969,0.394 -2.018,0.361 -2.075,0.35 -2.075,0.35 -2.875,0.35
  SIG/PWR1 region: -2.875,1.15 -2.075,1.15 -2.018,1.139 -1.969,1.106 -1.936,1.057 -1.925,1 -1.925,1 -1.936,0.943 -1.969,0.894 -2.018,0.861 -2.075,0.85 -2.075,0.85 -2.875,0.85
  SIG/PWR1 region: -2.875,1.65 -2.075,1.65 -2.018,1.639 -1.969,1.606 -1.936,1.557 -1.925,1.5 -1.925,1.5 -1.936,1.443 -1.969,1.394 -2.018,1.361 -2.075,1.35 -2.075,1.35 -2.875,1.35
  SIG/PWR1 region: -1.675,1.325 -1.325,1.675 1.675,1.675 1.675,-1.675 -1.675,-1.675 -1.675,1.325
  silkscreen extent -3.62,-2.55 2.55,2.55, body extent -2.98,-2.98 2.98,2.98, height 0.25
FP-CRCW0603-HPe3-MFG [mm]
  rect 0.75x1 smd paste+0 mask+0: 1(-0.75,0) 2(0.75,0)
  silkscreen extent -0.8,-0.9 0.8,0.9, body extent -1.22,-0.6 1.22,0.6, height 0.25
FP-DFN6-7946637-MFG#1 [mm]
  round 0.405 smd paste+0 mask+0: 1(-1.3,0.95) 2(-1.321,0) 3(-1.321,-0.95) 4(1.3,-0.95) 5(1.321,0) 6(1.321,0.95)
  rect 1.75x2.5 smd paste+0 mask+0: 7(0,0)
  SIG/PWR1 region: 1.905,0.725 1.275,0.725 1.189,0.742 1.116,0.791 1.067,0.864 1.05,0.95 1.05,0.95 1.067,1.036 1.116,1.109 1.189,1.158 1.275,1.175 1.275,1.175 1.905,1.175
  SIG/PWR1 region: 1.905,-0.225 1.275,-0.225 1.189,-0.208 1.116,-0.159 1.067,-0.086 1.05,0 1.05,0 1.067,0.086 1.116,0.159 1.189,0.208 1.275,0.225 1.275,0.225 1.905,0.225
  SIG/PWR1 region: 1.905,-1.175 1.275,-1.175 1.189,-1.158 1.116,-1.109 1.067,-1.036 1.05,-0.95 1.05,-0.95 1.067,-0.864 1.116,-0.791 1.189,-0.742 1.275,-0.725 1.275,-0.725 1.905,-0.725
  SIG/PWR1 region: -1.905,-0.725 -1.275,-0.725 -1.189,-0.742 -1.116,-0.791 -1.067,-0.864 -1.05,-0.95 -1.05,-0.95 -1.067,-1.036 -1.116,-1.109 -1.189,-1.158 -1.275,-1.175 -1.275,-1.175 -1.905,-1.175
  SIG/PWR1 region: -1.905,0.225 -1.275,0.225 -1.189,0.208 -1.116,0.159 -1.067,0.086 -1.05,0 -1.05,0 -1.067,-0.086 -1.116,-0.159 -1.189,-0.208 -1.275,-0.225 -1.275,-0.225 -1.905,-0.225
  SIG/PWR1 region: -1.905,1.175 -1.275,1.175 -1.189,1.158 -1.116,1.109 -1.067,1.036 -1.05,0.95 -1.05,0.95 -1.067,0.864 -1.116,0.791 -1.189,0.742 -1.275,0.725 -1.275,0.725 -1.905,0.725
  silkscreen extent -2.54,-1.75 1.55,1.75, body extent -1.65,-1.65 1.65,1.65, height 0.25
FP-DFN6-7946637-MFG#2 [mm]
  rrect50% 0.6x0.5 smd paste+0 mask+0: 1(-1.397,0.972) 2(-1.397,0.022) 3(-1.397,-0.95) 4(1.397,-0.95) 5(1.397,0) 6(1.397,0.95)
  rect 1.75x2.5 smd paste+0 mask+0: 7(0,0)
  silkscreen extent -2.79,-1.75 1.55,1.78, body extent -1.65,-1.65 1.65,1.65, height 0.25
FP-DNP0006A-MFG [mm]
  rrect100% 0.5x0.25 smd paste+0 mask+0: 1(-0.95,0.65) 2(-0.95,0) 3(-0.95,-0.65) 4(0.95,-0.65) 5(0.95,0) 6(0.95,0.65)
  rect 0.65x1.35 smd paste-1000 mask+0: 7(0,0)
  silkscreen extent -1.9,-1.15 1.05,1.15, body extent -1,-1 1,1, height 0.65
FP-GRM21B-0_2-e0_2_0_7-MFG [mm]
  rect 0.7x1.3 smd paste+0 mask+0: 1(-0.95,0) 2(0.95,0)
  silkscreen extent -0.23,-0.72 0.23,0.72, body extent -1.4,-0.82 1.4,0.82, height 0.25
FP-GRM188-0_1-e0_2_0_5-MFG [mm]
  rect 0.65x0.7 smd paste+0 mask+0: 1(-0.675,0) 2(0.675,0)
  silkscreen extent -0.85,-0.75 0.85,0.75, body extent -1.1,-0.55 1.1,0.55, height 0.25
FP-ICS-43434-MFG [mm]
  round 0.5 hole 0.5 unplated mask+0.665: 0(0.9,-2.074)
  rect 0.6x0.522 smd paste-0.05: 1(0,0) 2(0,-0.822) 4(1.8,-0.822) 5(1.8,0) 6(0.9,0)
  rect 0.1x0.1 smd paste-1 mask+0: 3(0.885,-2.744)
  SIG/PWR1 region: 250 vertices and 0 holes, not listed, extent 0.09,-2.891 1.71,-1.261
  silkscreen extent -1.24,-3.4 2.51,0.64, body extent -0.43,-3.11 2.23,0.39, height 0.98
FP-PH1-01-UA-MFG [mm]
  oval 2x1.57 hole 1.02 paste-2539.97 mask+0: 1(0,0)
  silkscreen extent -1.46,-1.44 1.46,1.44, body extent -1.56,-1.54 1.56,1.54, height 0.25
FP-PJ-102A-MFG [mm]
  rrect50% 3.8x1.8 hole 1 slot 2.6 at 0 deg paste-2539.97 mask+0: 1(0,-6.5)
  rrect100% 3.7x1.8 hole 1 slot 2.6 at 0 deg paste-2539.97 mask+0: 2(0,-0.5)
  rrect100% 1.8x3.8 hole 2.6 slot 1 at 0 deg paste-2539.97 mask+0: 3(-4.7,-3.5)
  silkscreen extent -4.9,-10.42 4.6,1.8, body extent -4.9,-7.33 4.5,7.07, height 11
FP-PTS526SK15SMTR2LFS-MFG [mm]
  rect 1.3x0.9 smd paste+0 mask+0.1: 1(-3,1.85) 2(3,1.85) 3(-3,-1.85) 4(3,-1.85)
  silkscreen extent -4.25,-2.7 2.7,2.7, body extent -3.6,-2.8 3.6,2.8, height 0.25
FP-RNCP0805-MFG [mm]
  rrect50% 1x1.3 smd paste+0 mask+0: 1(-1,0) 2(1,0)
  silkscreen extent -0.13,-0.7 0.13,0.7, body extent -1,-0.63 1,0.63, height 0.65
FP-SS8050-G-IPC_C [mm]
  rect 1.057x0.532 smd paste+0 mask+0: 1(-0.901,0.95)
  rrect100% 1.057x0.532 smd paste+0 mask+0: 2(-0.901,-0.95) 3(0.901,0)
  silkscreen extent 0,-1.45 0.65,1.45, body extent -1.53,-1.55 1.53,1.55, height 0.25
GSB1CA11101DSHR-Footprint-1 [mm]
  round 0.57 hole 0.57 unplated: 0(-3.746,0) 0(3.747,0)
  rect 0.3x0.87 smd mask+0.05: A1(-2.746,0.865) A4(-1.246,0.865) A5(-0.746,0.865) A6(-0.246,0.865) A7(0.254,0.865) A8(0.754,0.865) A9(1.254,0.865) A12(2.754,0.865) B1(2.754,-0.865) B4(1.254,-0.865) B5(0.754,-0.865) B6(0.254,-0.865) B7(-0.246,-0.865) B8(-0.746,-0.865) B9(-1.246,-0.865) B12(-2.746,-0.865)
  oval 1.4x1.15 hole 0.65 slot 0.9 at 0 deg: SH1(-2.396,2.15) SH2(2.404,2.15) SH3(-2.396,-2.15) SH4(2.404,-2.15)
  silkscreen extent -5.1,-1.58 4.47,1.58, body extent -5,-2.3 5,2.3, height 7.4
INDC4141X31N [mm] "Chip Inductor, 2-Leads, Body 4.10x4.10mm, IPC Medium Density"
  rect 1.5x3.8 smd: 1(-1.651,0) 2(1.651,0)
  silkscreen extent -0.55,-2.08 0.55,2.08, body extent -2.17,-2.17 2.17,2.17, height 3.1
MANUF_CAP_0603 [mm]
  rect 0.8x0.9 smd paste+0 mask+0: 1(-0.75,0) 2(0.75,0)
  silkscreen extent -1.1,-0.7 1.1,0.7, body extent -1.35,-0.75 1.35,0.75, height 0.25
MANUF_RES_0603 [mm]
  rect 0.65x0.9 smd paste+0 mask+0: 1(-0.725,0) 2(0.725,0)
  silkscreen extent -0.85,-0.88 0.85,0.88, body extent -0.77,-0.4 0.77,0.4, height 0.55
MEM2061-01-188-00-A-Footprint-1 [mm]
  rect 0.8x2 smd: 1(1.915,-3.475) 2(0.815,-3.075) 3(-0.285,-3.475) 4(-1.385,-3.675) 5(-2.485,-3.475) 6(-3.585,-3.675) 7(-4.685,-3.475) 8(-5.785,-3.475)
  rect 1.8x1.4 smd: 9(-4.975,7.075) 10(0.725,7.075)
  rect 1.4x1.9 smd: 11(-6.575,-6.075) 12(6.575,-7.075)
  Keep-Out Layer region: -7.025,4.925 3.345,4.925 3.345,2.845 -7.025,2.845
  silkscreen extent -7.02,-7.97 6.98,7.48, body extent -7.15,-7.9 7.05,7.55, height 1.95
"Net tie solid pad-Footprint-1" [mm]
  rect 0.5x0.5 smd paste-1 mask+0.1: 1(-0.55,0) 2(0.508,0)
  SIG/PWR1 region: -0.385,0.181 -0.385,-0.194 0.315,-0.194 0.34,-0.194 0.34,0.181
ONSC-SOD-923-2-514AB-01_V [mm] "SOD, 2-Leads, Body 0.8x0.6mm"
  rect 0.36x0.25 smd: 1(-0.42,0) 2(0.42,0)
  silkscreen extent -0.47,0.48 -0.37,0.57, body extent -0.4,-0.3 0.4,0.3, height 0.4
PAD-Footprint-1 [mil]
  round 60 smd: 1(0,0)
RESC0603(1608)_L [mm] "Chip Resistor, Body 1.6x0.8mm, IPC High Density"
  rrect25% 0.66x0.76 smd: 1(-0.7,0) 2(0.7,0)
  silkscreen extent 0,-0.3 0,0.3, body extent -0.8,-0.4 0.8,0.4, height 0.45
S4B-PH-K-S-Footprint-1 [mm]
  oval 1.5x1.8 hole 0.8: 1(6,0) 2(4,0) 3(2,0) 4(0,0)
  silkscreen extent 1.78,-5.84 8.03,2.7, body extent -1.95,-6.31 7.95,1.29, height 6.8
S8MK+1_M [mm] "SOIC, 8-Leads, Body 4.9x3.9mm, Pitch 1.27mm, IPC Low Density"
  oval 2.5x0.7 smd: 1(-2.45,1.905) 2(-2.45,0.635) 3(-2.45,-0.635) 4(-2.45,-1.905) 5(2.45,-1.905) 6(2.45,-0.635) 7(2.45,0.635) 8(2.45,1.905)
  silkscreen extent -2.58,-2.5 0.8,2.93, body extent -2,-2.5 2,2.5, height 1.75
SGP41-D-R4-Footprint-1 [mm]
  rect 0.55x0.4 smd paste-0.05 mask+0: 1(-1.15,0.8) 2(-1.15,0) 3(-1.15,-0.8) 4(1.15,-0.8) 5(1.15,0) 6(1.15,0.8)
  rect 0.5x0.5 smd paste-1 mask+0: 7(0,0)
  SIG/PWR1 region: 0.625,-0.85 -0.625,-0.85 -0.625,0.55 -0.325,0.85 0.625,0.85
  silkscreen extent -2.15,-1.32 1.22,1.32, body extent -1.22,-1.22 1.22,1.22, height 0.95
SON50P300X100_HS-11N [mm] "SON, 10-Leads, Body 3.00x3.00mm, Pitch 0.50mm, Thermal Pad 2.40x1.49mm, IPC Medium Density"
  rrect50% 0.7x0.24 smd mask+0.07: 1(-1.5,1) 2(-1.5,0.5) 3(-1.5,0) 4(-1.5,-0.5) 5(-1.5,-1) 6(1.5,-1) 7(1.5,-0.5) 8(1.5,0) 9(1.5,0.5) 10(1.5,1)
  rect 1.65x2.4 smd: 11(0,0)
  silkscreen extent -2.51,-1.7 1.7,1.83, body extent -1.6,-1.55 1.6,1.55, height 1
SOT50P160X80-3N [mm] "SOT23, 3-Leads, Body 1.60x1.60mm, Pitch 0.50mm, IPC Medium Density"
  rect 0.6x0.4 smd: 1(-0.62,0.5) 2(-0.62,-0.5)
  rect 0.6x0.5 smd: 3(0.62,0)
  silkscreen extent -0.76,-0.85 0.43,1.4, body extent -0.87,-0.85 0.87,0.85, height 0.8
SOT95P285X130-6N [mm] "SOT23, 6-Leads, Body 3.00x2.85mm, Pitch 0.95mm, IPC Medium Density"
  rect 1.05x0.6 smd: 1(-1.375,0.95) 2(-1.375,0) 3(-1.375,-0.95) 4(1.375,-0.95) 5(1.375,0) 6(1.375,0.95)
  silkscreen extent -1.5,-1.55 0.45,1.92, body extent -1.5,-1.55 1.5,1.55, height 1.3
TSOP65P490X110-8N [mm] "TSOP, 8-Leads, Body 3.00x3.00mm, Pitch 0.65mm, IPC Medium Density"
  rrect50% 1.45x0.45 smd mask+0: 1(-2.225,0.975) 2(-2.225,0.325) 3(-2.225,-0.325) 4(-2.225,-0.975) 5(2.225,-0.975) 6(2.225,-0.325) 7(2.225,0.325) 8(2.225,0.975)
  silkscreen extent -2.35,-1.55 1.15,1.9, body extent -2.45,-1.55 2.45,1.55, height 1.1
TSSOP50P490X110-10N [mm] "TSSOP, 10-Leads, Body 3.00x3.00mm, Pitch 0.50mm, IPC Medium Density"
  rrect50% 1.35x0.3 smd mask+0: 1(-2.225,1) 2(-2.225,0.5) 3(-2.225,0) 4(-2.225,-0.5) 5(-2.225,-1) 6(2.225,-1) 7(2.225,-0.5) 8(2.225,0) 9(2.225,0.5) 10(2.225,1)
  silkscreen extent -2.35,-1.55 1.15,1.83, body extent -2.45,-1.55 2.45,1.55, height 1.1